# EAGLE board tractor (EAGLE 7.7.0)
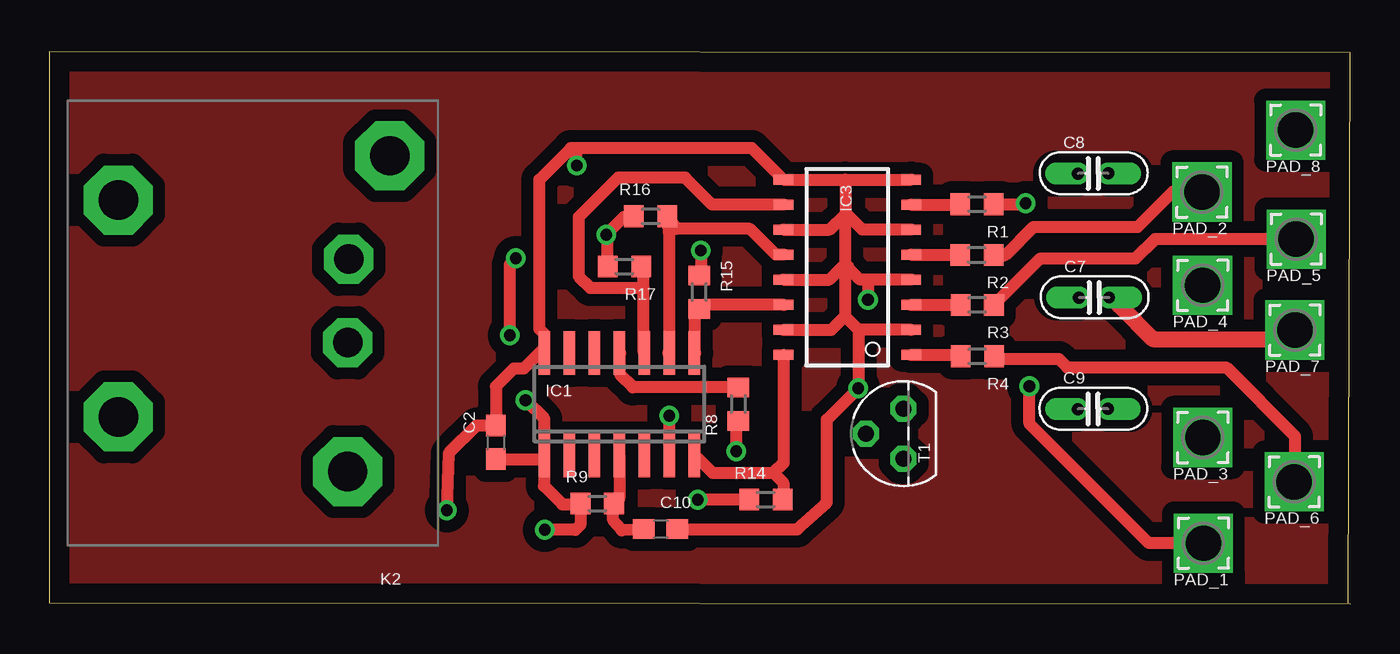
[diagram p0: board, top side]
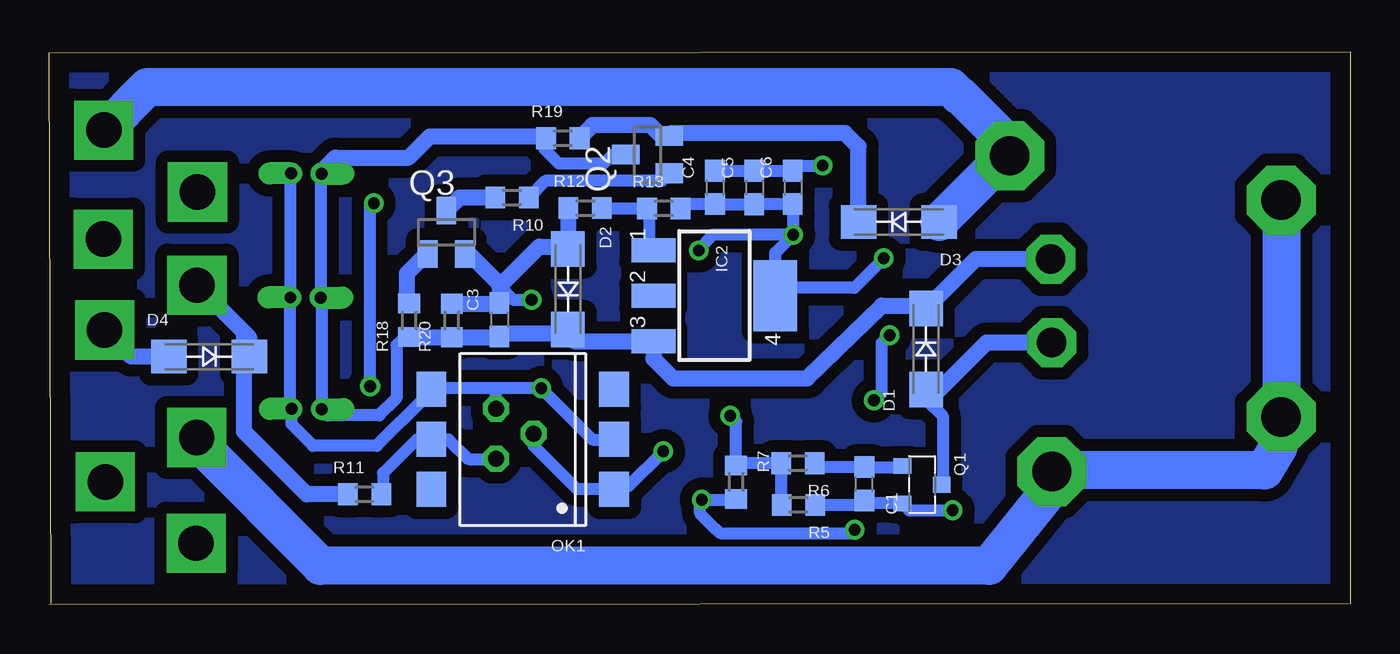
[diagram p1: board, bottom side, seen from below]

Size 66.1 x 28.07 mm. Coordinates in mm from the lower left corner, seen from the top.
Outline: 66,0.06 66.1,28.01 0,28.07 0,0.06 66.1,0
Copper layers (1*16): Top 0.035mm / dielectric 1.5mm / Bottom 0.035mm
Design rules "default": minimum track width 10mil, minimum drill 24mil, track to track 8mil, track to pad 8mil, pad to pad 8mil, via to via 8mil, smd to smd 8mil, copper to edge 40mil, drill to drill 8mil, minimum pad ring 10mil, minimum via ring 8mil, stop-mask expansion 4mil, vias tented up to drill 0mil, thermal gap 10mil

## Footprints (pad centres in the part's own frame; a part is rotated, then mirrored left to right if it is on the bottom)
C0603 = smd 1.1 x 1: 1 -0.85,0; 2 0.85,0
C025-025X050 = drill 0.6 pad 0.889 offset: 1 -0.776,-0.006; 2 0.759,0.007
SMA-DO214AC = smd 1.8 x 1.7: A -2.05,0; K 2.05,0
SO-14 = smd 0.6 x 2.2: 1 -3.81,-2.6; 2 -2.54,-2.6; 3 -1.27,-2.6; 4 0,-2.6; 5 1.27,-2.6; 6 2.54,-2.6; 7 3.81,-2.6; 8 3.81,2.6; 9 2.54,2.6; 10 1.27,2.6; 11 0,2.6; 12 -1.27,2.6; 13 -2.54,2.6; 14 -3.81,2.6
SOT223 = smd 1.219 x 2.235: 1 -2.311,-3.099; 2 0,-3.099; 3 2.311,-3.099 | smd 3.6 x 2.2: 4 0,3.099
MINI-FLAT-16 = smd 1 x 0.5: 1 -3.24,4.445; 2 -3.24,3.175; 3 -3.24,1.905; 4 -3.24,0.635; 5 -3.24,-0.635; 6 -3.24,-1.905; 7 -3.24,-3.175; 8 -3.24,-4.445; 9 3.24,-4.445; 10 3.24,-3.175; 11 3.24,-1.905; 12 3.24,-0.635; 13 3.24,0.635; 14 3.24,1.905; 15 3.24,3.175; 16 3.24,4.445
RL703 = drill 1.5 pad 2.5 octagon: 1 1.33,-6.143; 2 -2.91,-6.193 | drill 2 pad 3.5 octagon: C1 7.88,-6.143; C2 5.1,5.507; C3 -5.91,5.507; NO -8.16,-8.283
DIL6-SMD = smd 1.78 x 1.52: 1 -2.54,-4.645; 2 0,-4.645; 3 2.54,-4.645; 4 2.54,4.645; 5 0,4.645; 6 -2.54,4.645
2,54/1,1 = drill 1.8 pad 3 square: 1 0,0
MICRO3 = smd 0.8 x 0.9: 1 -0.95,-1; 2 0.95,-1; 3 0,1
SOT23 = smd 1 x 1.4: 1 -0.95,-1.1; 2 0.95,-1.1; 3 0,1.1
R0603 = smd 1 x 1.1: 1 -0.85,0; 2 0.85,0
TO92 = drill 0.813 octagon: 1 1.27,0; 2 0,1.905; 3 -1.27,0

## Placement (x,y rotation side)
C1  1nf  [C0603]  24.69,6.12 90 bottom
C2  100nf  [C0603]  22.69,8.23 270 top
C3  100nf  [C0603]  43.23,14.46 270 bottom
C4  100nF  [C0603]  32.28,21.18 270 bottom
C5  10nF  [C0603]  30.28,21.17 270 bottom
C6  1uF  [C0603]  28.32,21.18 270 bottom
C7  220uf  [C025-025X050]  53.09,15.58 0 top
C8  220uf  [C025-025X050]  53.04,21.88 0 top
C9  220uf  [C025-025X050]  53.03,9.92 0 top
C10  100nf  [C0603]  31.06,3.82 180 top
D1  LL4148  [SMA-DO214AC]  21.55,12.97 90 bottom
D2  1N34  [SMA-DO214AC]  39.75,16.01 270 bottom
D3  Fm4007  [SMA-DO214AC]  22.93,19.42 180 bottom
D4  Fm4007  [SMA-DO214AC]  57.97,12.58 0 bottom
IC1  PIC16F1824  [SO-14]  28.96,10.17 0 top
IC2  317EMP  [SOT223]  32.31,15.68 270 bottom
IC3  TLP283-4  [MINI-FLAT-16]  40.55,17.12 180 top
K2  RL703  [RL703]  9.02,14.62 270 bottom
OK1  H11L1MS  [DIL6-SMD]  42.04,8.38 90 bottom
PAD_1  [2,54/1,1]  58.64,3.11 180 top
PAD_2  [2,54/1,1]  58.57,20.94 180 top
PAD_3  [2,54/1,1]  58.61,8.48 180 top
PAD_4  [2,54/1,1]  58.59,16.21 180 top
PAD_5  [2,54/1,1]  63.35,18.56 180 top
PAD_6  [2,54/1,1]  63.25,6.23 180 top
PAD_7  [2,54/1,1]  63.28,13.94 180 top
PAD_8  [2,54/1,1]  63.32,24.09 180 top
Q1  IRLML2402  [MICRO3]  21.76,6.08 270 bottom
Q2  [SOT23]  35.7,22.84 90 bottom
Q3  [SOT23]  45.92,18.89 0 bottom
R1  1k  [R0603]  47.13,20.32 180 top
R2  1k  [R0603]  47.13,17.74 180 top
R3  1k  [R0603]  47.15,15.21 180 top
R4  1k  [R0603]  47.15,12.6 180 top
R5  10k  [R0603]  28.04,5.05 180 bottom
R6  10k  [R0603]  28.07,7.17 180 bottom
R7  1K  [R0603]  31.21,6.21 270 bottom
R8  470  [R0603]  35.01,10.17 90 top
R9  10K  [R0603]  27.85,5.12 0 top
R10  1k  [R0603]  42.59,20.66 180 bottom
R11  470  [R0603]  50.08,5.59 0 bottom
R12  1k5  [R0603]  38.88,20.13 0 bottom
R13  470  [R0603]  34.88,20.11 0 bottom
R14  1K  [R0603]  36.41,5.32 0 top
R15  1K  [R0603]  33.02,15.86 270 top
R16  1K  [R0603]  30.55,19.71 0 top
R17  1K  [R0603]  29.22,17.16 180 top
R18  270R  [R0603]  47.81,14.42 90 bottom
R19  220  [R0603]  40.01,23.67 0 bottom
R20  10k  [R0603]  45.65,14.41 90 bottom
T1  BC547  [TO92]  43.4,8.67 90 top

## Library data of the parts
C1-C6 C10 = eagle-ltspice; SPICEMODEL: NONE; SPICEPREFIX: C
C7-C9 = rcl
D1-D4 = diode
IC1 = microchip
IC2 = lm317
IC3 OK1 = optocoupler; OC_FARNELL: unknown; OC_NEWARK: unknown
K2 = relay
PAD_1-PAD_8 = wirepad
Q1 = transistor-power
Q2 Q3 = semicon-smd-ipc
R1-R20 = eagle-ltspice; SPICEMODEL: NONE; SPICEPREFIX: R
T1 = transistor-neu-to92

## Nets
12V_8: D3.A K2.NO PAD_8.1
BUZZ_4: D4.K PAD_4.1 R11.1
GND: C1.1 C2.1 C3.1 C4.1 C5.1 C6.1 C7.2 C8.2 C9.2 C10.1 D2.A D4.A IC1.14 IC3.2 IC3.4 IC3.6 IC3.8 IC3.9 IC3.11 IC3.13 IC3.15 OK1.2 OK1.4 PAD_7.1 Q1.2 Q3.2 R5.1 R12.1 R20.2 T1.1
GR_1: PAD_1.1 R1.1
HB_2: PAD_2.1 R2.1
N$3: IC1.10 IC3.10 R17.1
N$5: D1.A K2.1 Q1.3
N$7: Q2.1 R10.1
N$8: Q3.1 R18.2
N$9: Q3.3 R10.2
N$11: D3.K Q2.2 R19.2
N$14: IC2.1 R12.2 R13.1
N$72: C1.2 Q1.1 R6.1
N$74: IC1.6 R5.2 R6.2 R7.1
N$76: IC3.1 R4.2
N$78: IC3.3 R3.2
N$80: IC3.5 R2.2
N$82: IC3.7 R1.2
N$84: IC1.9 IC3.12 R16.2
N$85: IC1.8 IC3.14 R15.2
N$86: IC1.7 IC3.16 R14.2
N$87: C10.2 IC1.4 R9.2
N$88: IC1.11 R8.2
N$89: OK1.1 R8.1 T1.2
N$90: OK1.5 R11.2 T1.3
PTO_5: PAD_5.1 R3.1
R_3: K2.C1 K2.C2 K2.C3 PAD_3.1
SS_6: PAD_6.1 R4.1
VCC: C2.2 C4.2 C5.2 C6.2 IC1.1 IC2.4 R7.2 R9.1 R13.2 R14.1 R15.1 R16.1 R17.2
VDD: C3.2 C7.1 C8.1 C9.1 D1.K D2.K IC2.3 K2.2 Q2.3 R18.1 R19.1 R20.1

## Tracks (layer width: path | path; a pad name or v marks a point on that pad's centre or on a via)
12V_8
  Bottom 1.93: PAD_8.1 63.28,24.09 61.11,26.26 20.3,26.26 19.89,25.85 19.83,25.85 17.3,23.33 K2.NO 17.52,22.78 D3.A
BUZZ_4
  Bottom 0.813: R11.1 53.02,5.59 56.2,8.77 56.2,13.81 | 56.2,13.81 PAD_4.1 | D4.K 55.92,13.53 56.2,13.81
GND  (via drill 0.6)
  Top 0.61: 40.44,21.57 IC3.9 35.7,23.17 26.8,23.17 | 40.44,21.57 IC3.8 | IC3.11 39.64,19.03 40.44,19.83 | 40.48,19.86 40.48,21.53 40.44,21.57 | IC3.6 41.31,19.03 40.48,19.86 | IC3.4 41.6,16.49 | 41.6,16.49 41.2,16.49 40.59,17.1 40.59,17.15 40.48,17.26 | 40.48,17.26 40.44,17.3 | 40.44,17.3 40.44,19.83 | 40.44,19.83 40.48,19.86 | IC3.13 39.63,16.49 40.44,17.3 | IC3.2 41.1,13.95 | 41.1,13.95 40.42,14.63 | 40.48,17.26 40.42,17.2 40.42,14.63 | IC3.15 39.73,13.95 40.42,14.63 | v20.2,4.77 20.3,7.67 21.7,9.08 C2.1 22.7,9.09 22.7,11.07 23.6,11.97 24.1,11.97 24.96,12.84 25.09,12.84 IC1.14 25.15,13.72 24.9,13.97 24.9,21.57 26.5,23.17 26.8,23.17 | 41.6,16.49 v41.6,15.47 | v26.8,22.29 26.8,23.17 | 41.1,13.95 v41.1,10.97 | v41.1,10.97 | C10.1 38,3.81 39.51,5.16 39.51,9.38 v41.1,10.97
  Top 0.813: C7.2 54.36,15.18 56.07,13.47 62.82,13.47 PAD_7.1
  Bottom 0.61: R5.1 24.91,5.05 C1.1 24.55,5.13 Q1.2 22.4,4.77 v20.2,4.77 | C4.1 C5.1 C6.1 28.06,22.29 v26.8,22.29 | 43.23,16.15 42.55,15.47 v41.6,15.47 | 43.3,10.97 v41.1,10.97 38.5,8.37 OK1.2 | 43.3,10.97 46.82,10.97 | 46.82,10.97 46.98,10.97 46.98,10.53 49.46,8.05 52.69,8.05 53.79,9.15 C9.2 53.85,9.93 C7.2 53.85,21.89 C8.2 | T1.1 43.4,10.87 43.3,10.97 | OK1.4 46.77,10.92 46.82,10.97
  Bottom 0.813: 43.16,16.21 43.23,16.15 C3.1 43.27,15.26 R20.2 | 43.16,16.21 41.2,18.17 39.86,18.17 D2.A | 39.93,17.77 D2.A | R12.1 39.76,17.95 D2.A | D4.A 61.93,12.58 PAD_7.1 | Q3.2 44.75,17.79 43.16,16.21
GR_1  (via drill 0.6)
  Top 0.61: PAD_1.1 55.87,3.11 49.8,9.17 v49.8,11.07 | R1.1 49.55,20.32 v49.6,20.37
  Bottom 0.61: v49.8,11.07 49.8,20.17 v49.6,20.37
HB_2
  Top 0.61: 48.01,17.77 R2.1 48.57,17.74 50,19.17 55.3,19.17 57.1,20.97 58.53,20.97 PAD_2.1
N$1
  pour Bottom (isolate 0.61): 66,0.06 0,0.06 0,27.97 66,27.97
N$3
  Top 0.61: IC1.10 30.2,12.8 30.2,16.07 | 30.2,16.07 30.2,17.03 R17.1 | IC3.10 33.68,20.3 32.3,21.67 28.9,21.67 26.9,19.67 26.9,16.67 27.5,16.07 30.2,16.07
N$5
  Bottom 0.61: 21.2,10.57 D1.A 21.55,10.43 20.7,9.57 20.7,6.14 Q1.3
  Bottom 0.813: K2.1 18.48,13.29 21.2,10.57
N$6
  pour Top (isolate 0.61): 65.9,0.06 0,0.06 0,27.97 65.9,27.97
N$7
  Bottom 0.61: Q2.1 34.99,21.5 40.9,21.5 R10.1
N$8
  Bottom 0.813: Q3.1 46.94,17.79 47.94,16.79 47.94,15.4 R18.2
N$9
  Bottom 0.813: R10.2 45.25,20.66 Q3.3
N$11
  Bottom 0.813: D3.K 24.98,23.25 25.66,23.93 34.46,23.93 Q2.2 35.01,23.79 35.55,24.33 38.5,24.33 R19.2
N$14
  Bottom 0.61: IC2.1 35.6,18.18 35.6,19.98 R13.1 R12.2
N$72
  Bottom 0.61: R6.1 27.12,6.97 C1.2 22.82,6.97 Q1.1
N$74  (via drill 0.6)
  Top 0.61: IC1.6 v31.5,9.57
  Bottom 0.61: R5.2 28.89,7.03 R6.2 31.1,7.17 R7.1 | 31.2,7.05 R7.1 | R7.1 31.21,9.28 v31.5,9.57
N$76
  Top 0.61: IC3.1 46.22,12.68 R4.2
N$78
  Top 0.61: IC3.3 46.28,15.22 R3.2
N$80
  Top 0.61: IC3.5 46.26,17.76 R2.2
N$82
  Top 0.61: IC3.7 46.25,20.3 R1.2
N$84
  Top 0.61: 31.44,12.77 IC1.9 31.5,18.71 R16.2 31.87,19.07 35.6,19.07 36.92,17.76 IC3.12
N$85
  Top 0.61: IC1.8 32.82,12.77 32.82,14.81 R15.2 | 33.01,15.22 R15.2 | IC3.14 33.23,15.22 R15.2
N$86
  Top 0.61: IC3.16 37.3,7.18 36.8,6.67 | IC1.7 32.77,7.6 | 32.77,8.35 32.77,7.6 | 32.77,7.6 33.7,6.67 36.8,6.67 | 36.8,6.67 37.3,6.17 37.3,5.36 R14.2
N$87
  Top 0.61: IC1.4 28.96,5.39 R9.2 28.65,5.08 28.65,4.28 29.1,3.76 C10.2
N$88
  Top 0.61: R8.2 29.66,11.02 29,11.67 29,12.73 IC1.11
N$89  (via drill 0.6)
  Top 0.61: R8.1 34.9,9.31 v34.9,7.77
  Bottom 0.61: 35,7.67 v34.9,7.77 36.66,6.02 37.55,6.02 | 37.75,6.02 37.55,6.02 | 37.55,5.87 39.3,5.87 41.49,8.07 T1.2 | OK1.1 37.39,5.87 37.55,5.87 | 37.55,5.87 37.55,6.02
N$90
  Bottom 0.61: 49.4,5.77 R11.2 49.14,5.68 49.14,6.66 47.43,8.37 OK1.5 | T1.3 43.43,7.37 44.8,7.37 45.8,8.37 OK1.5 | OK1.5
PTO_5
  Top 0.61: R3.1 50.36,17.57 50.37,17.56 55.19,17.56 56.18,18.56 PAD_5.1
R_3
  Bottom 1.93: PAD_3.1 58.4,8.27 58.4,8.07 52.31,1.95 18.35,1.95 15.09,6.01 15.09,6.67 K2.C1 15.1,6.8 4.36,6.8 3.61,8.07 K2.C2 K2.C3
SS_6
  Top 0.61: R4.1 48.13,12.47 51.28,12.47 51.72,12.03 59.79,12.03 63.29,8.53 63.29,6.27 PAD_6.1
VCC  (via drill 0.6)
  Top 0.61: C2.2 24.96,7.38 25.14,7.55 | 26.97,5.09 R9.1 | 25.14,7.55 IC1.1 25.15,9.42 v24.2,10.37 | R9.1 | v33.1,17.97 33.1,16.79 R15.1 | 28.36,18.71 v28.3,18.77 | v23.4,13.67 23.4,17.27 v23.7,17.57 | v32.95,5.32 R14.1 | R17.2 28.37,18.7 v28.3,18.77 | R16.1 29.24,19.71 v28.3,18.77 | 25.14,7.55 25.14,6.02 26.07,5.08 26.96,5.08 R9.1 | R9.1 27,5.11 26.99,5.11 26.99,4.04 26.73,3.79 v25.18,3.79 v25.18,3.78
  Bottom 0.61: v28.3,18.77 28.3,20.3 C6.2 C5.2 C4.2 33.53,20.32 R13.2 | R7.2 31.25,5.32 v32.95,5.32 33.03,5.24 33.03,4.61 32.22,3.8 32.2,3.8 32.02,3.62 25.34,3.62 v25.18,3.78 | v28.3,18.77 32.4,18.77 v33.1,17.97 | IC2.4 29.21,16.22 | 29.21,16.22 29.21,17.87 v28.3,18.77 | v24.2,10.37 23.8,10.77 23.8,13.27 v23.4,13.67 | v23.7,17.57 25.2,16.07 29.06,16.07 29.21,16.22
VDD
  Bottom 0.61: 39.45,13.37 D2.K | D1.K 21.32,15.02 | C8.1 52.31,21.88 C7.1 52.25,15.58 C9.1 51.94,9.6 49.33,9.6 48.46,10.47 48.46,13.16 48.05,13.57 R18.1 | Q2.3 37.47,22.84 37.93,22.38 40.2,22.38 40.94,23.12 40.94,23.59 R19.1 | C3.2 43.08,13.76
  Bottom 0.813: 43.29,13.67 C3.2 | 43.08,13.76 39.95,13.76 D2.K | 39.45,13.37 IC2.3 35.4,12.48 34.4,11.47 27.6,11.47 23.8,15.17 21.71,15.17 D1.K 19.04,17.53 K2.2 | 43.3,13.53 C3.2 | R18.1 R20.1 43.27,13.56 C3.2 | C8.1 52.26,21.99 51.57,22.68 47.84,22.68 46.75,23.77 40.96,23.77 R19.1